# Altium PCB PCB1.PcbDoc
Units mil, origin at the board's own origin, x right, y up, seen from the top; angles counter-clockwise.
Board outline 805.03 x 965.03 mil, 2 copper layers (Top Layer, Bottom Layer); 15 components, 12 nets, 64 pads, 9 vias.
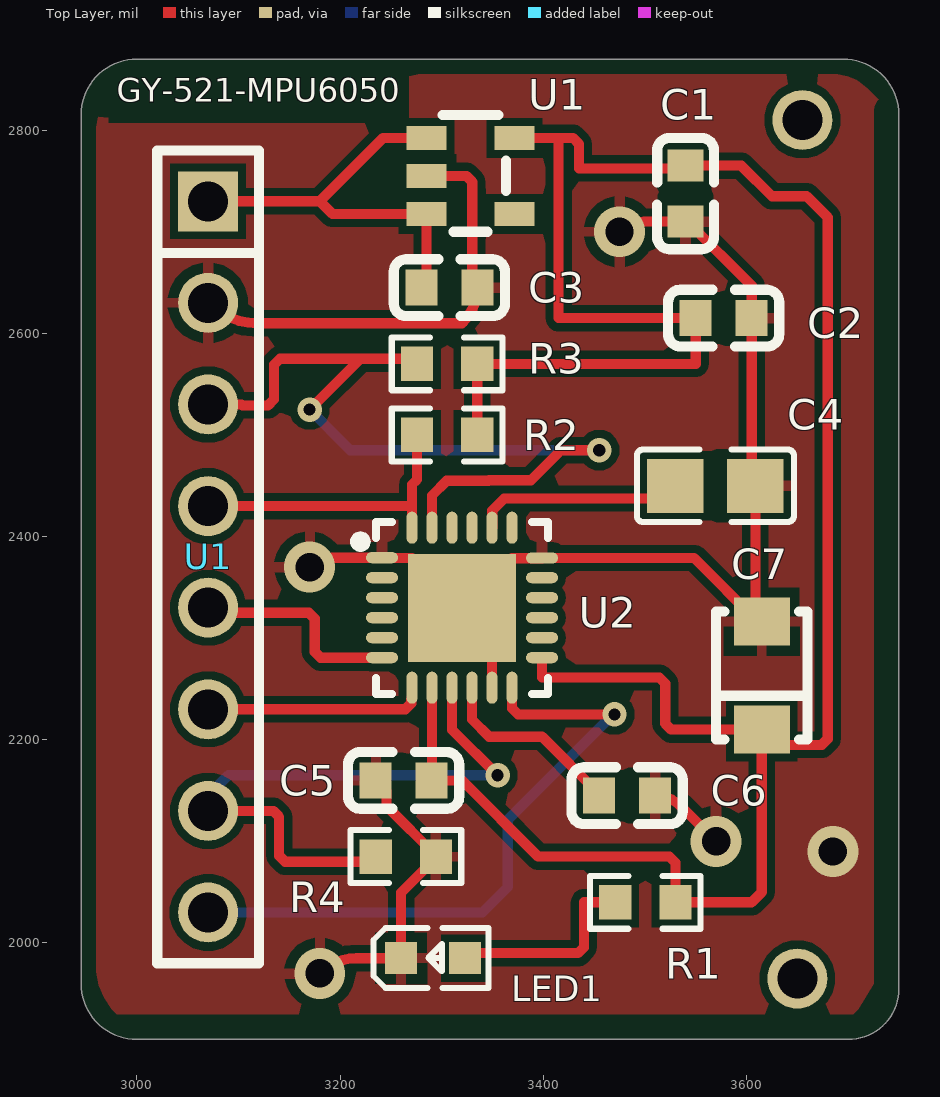
[diagram p0: Top Layer view]
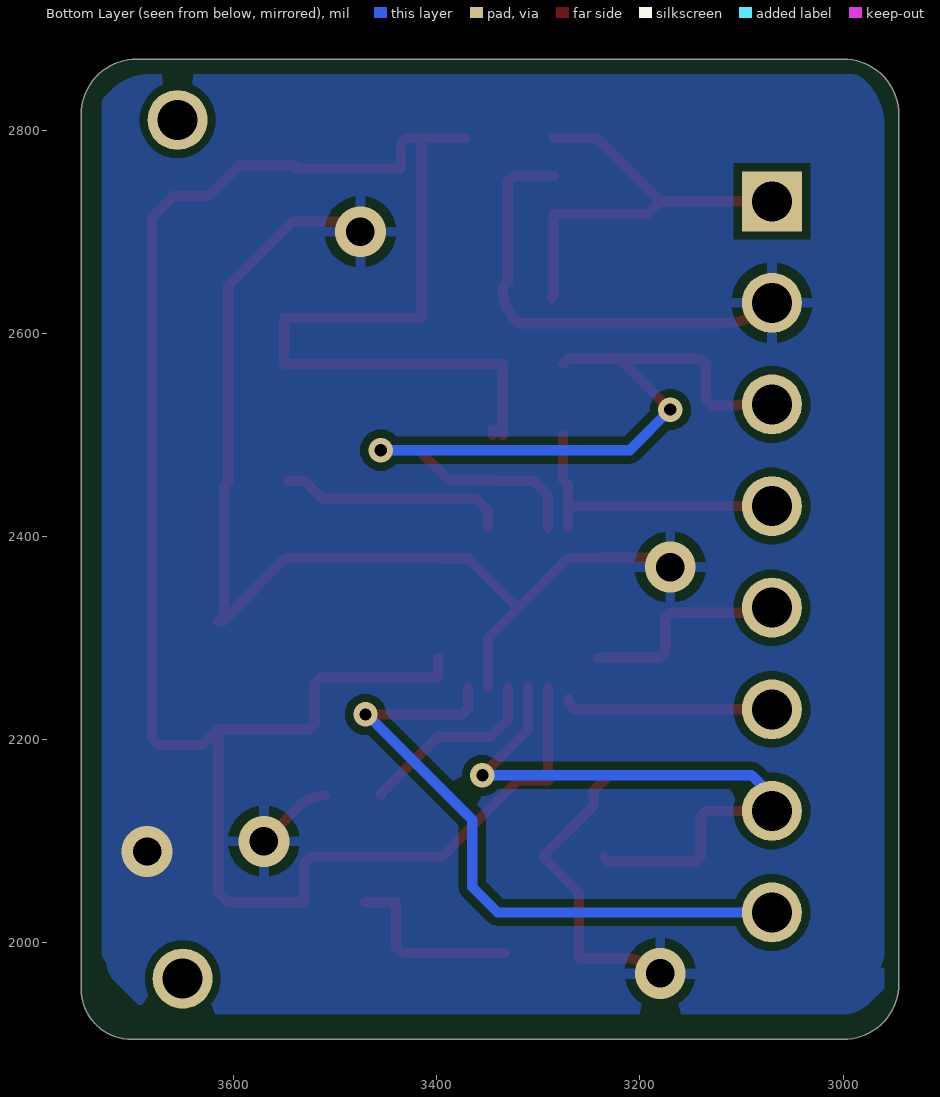
[diagram p1: Bottom Layer view, seen from below]

## Layer stack, top to bottom
Top Solder: solder mask 0.4, Solder Resist, Dk 3.5
Top Layer: signal copper 1.4
Dielectric 1: dielectric 12.6, FR-4, Dk 4.8
Bottom Layer: signal copper 1.4
Bottom Solder: solder mask 0.4, Solder Resist, Dk 3.5

## Board outline
2944.99,1960 2944.99,2815 cw(c3000,2815) 3000,2870.01 3695,2870.01 cw(c3695,2815) 3750.01,2815 3750.01,1955 cw(c3700,1955) 3700,1904.98 3000,1904.98 cw(c3000,1960)

## Design rules (kind name [scope] priority, off if disabled: settings)
Clearance [All] p1: gap=8 ignorepadtopadclearanceinfootprint=FALSE
MinimumSolderMaskSliver [All] p1: minsoldermaskwidth=4
PolygonConnect [All] p1: connectstyle=Relief reliefconductorwidth=10 reliefentries=4 polygonreliefangle="90 Angle" airgapwidth=10
RoutingVias [All] p1: holewidth=28 width=50 viastyle="Through Hole" minholewidth=28 minwidth=50 maxholewidth=28 maxwidth=50
SilkToSilkClearance [All] p1: silktosilkclearance=4.5
SilkToSolderMaskClearance [IsPad] p1: minsilkscreentomaskgap=3.5 clearancetoexposedcopper=TRUE
SolderMaskExpansion [All] p1: expansion=4 istentingtop=FALSE
SupplyNets "Schematic Supply Nets_2" [InNet('+3V3')] p1: voltage=0.000
SupplyNets "Schematic Supply Nets_1" [InNet('GND')] p2: voltage=0.000
SupplyNets "Schematic Supply Nets" [InNet('+MAX6V')] p3: voltage=0.000
Width [All] p1: maxlimit=10 minlimit=10 preferedwidth=10
27 further rules are at their usual default settings.

## Classes and differential pairs
component class Sheet1: C2 C3 C4 C5 C6 C7 LED1 R1 R2 R3 R4 U1 U2

## Components (designator, comment, footprint, x,y, rotation, side; value= is the part's Value field where it differs from the comment)
C1 "100nF" C0603 3540,2737.56 r90 top
C2 "100nF" C0603 3577.56,2615 r180 top
C3 "4.7uF" C0603 3307.56,2645 r180 top
C4 "" C0805 3569.37,2450 r0 top value=2.2nF/50V
C5 "10nF" C0603 3262.56,2160 r180 top value=100nF
C6 "100nF" C0603 3482.44,2145 r180 top
C7 "0.1uF" CAP-SMD_L3.2-W1.6 3615,2263.15 r90 top
LED1 "19-217/R6C-AL1M2VY/3T" LED0603-RD 3291.47,1985 r0 top
R1 "2kΩ" R0603 3500.34,2040 r180 top
R2 "4.7kΩ" R0603 3305.34,2500 r0 top
R3 "4.7kΩ" R0603 3305.34,2570 r0 top
R4 "4.7kΩ" R0603 3264.66,2085 r0 top
U1 "HX9193-33GB-N" SOT-23-5_L2.9-W1.6-P0.95-LS2.8-BL 3328.31,2755 r270 top
U1 "Z-211-0811-0021-001" HDR-TH_8P-P2.54-V-M 3070,2380 r270 top
U2 "MPU-6050" QFN-24_L4.0-W4.0-P0.50-BL-EP2.7 3320,2330 r270 top

## Footprints (in the part's own frame and the unit in brackets; to place one, negate y for a bottom-side part, rotate by r counter-clockwise, add the part's x,y. Pads: shape width x height; smd on the part's side, far side on the other; paste and mask are expansions set on the pad)
C0603 [mm]
  rect 0.8x0.9 smd: 1(-0.7,0) 2(0.7,0)
  silkscreen extent -1.39,-0.71 1.39,0.71
C0805 [mm]
  rect 1.41x1.35 smd paste-100 mask+0.051: 1(-1,0) 2(1,0)
  silkscreen extent -1.96,-0.9 1.96,0.9
CAP-SMD_L3.2-W1.6 [mm]
  rect 1.2x1.4 smd paste+0 mask+0.051: 1(-1.35,0) 2(1.35,0)
  silkscreen extent -1.6,-1.14 1.6,1.14
HDR-TH_8P-P2.54-V-M [mm]
  rect 1.5x1.5 hole 1 paste-2539.97 mask+0.051: 1(-8.89,0)
  round 1.5 hole 1 paste-2539.97 mask+0.051: 2(-6.35,0) 3(-3.81,0) 4(-1.27,0) 5(1.27,0) 6(3.81,0) 7(6.35,0) 8(8.89,0)
  silkscreen extent -10.16,-1.27 10.16,1.27
LED0603-RD [mm]
  rect 0.8x0.8 smd paste+0 mask+0.051: 1(-0.799,0) 2(0.799,0)
  silkscreen extent -1.49,-0.75 1.39,0.76
QFN-24_L4.0-W4.0-P0.50-BL-EP2.7 [mm]
  oval 0.28x0.8 smd paste-100 mask+0.05: 1(-1.25,-2) 2(-0.75,-2) 4(0.25,-2) 5(0.75,-2) 6(1.25,-2) 13(1.25,2) 14(0.75,2) 15(0.25,2) 16(-0.25,2) 17(-0.75,2) 18(-1.242,2)
  oval 0.28x0.8 smd paste+0 mask+0.05: 3(-0.25,-2)
  oval 0.8x0.28 smd paste-100 mask+0.05: 7(2,-1.25) 8(2,-0.75) 9(2,-0.25) 10(2,0.25) 11(2,0.75) 12(2,1.25) 19(-2,1.25) 20(-2,0.75) 22(-2,-0.25) 23(-2,-0.75) 24(-2,-1.25)
  oval 0.8x0.28 smd paste+0 mask+0.05: 21(-2,0.25)
  rect 2.7x2.7 smd paste-100 mask+0.05: 25(0.012,0)
  silkscreen extent -2.14,-2.79 2.16,2.15
R0603 [mil]
  rect 31.75x34.02 smd paste-3937.01 mask+2: 1(-29.66,0) 2(29.66,0)
  silkscreen extent -55,-26 55,26
SOT-23-5_L2.9-W1.6-P0.95-LS2.8-BL [mm]
  rect 0.6x1 smd paste+0 mask+0.05: 1(-0.95,-1.1) 2(0,-1.1) 3(0.95,-1.1) 4(0.95,1.1) 5(-0.95,1.1)
  silkscreen extent -1.52,-0.7 1.4,0.89

## Part data
C1 C2 C5 C6: library part CC0603KRX7R9BB104, JLCPCB Part Class="Basic Part", LCSC Part Name="100nF ±10% 50V", Manufacturer=YAGEO(国巨), Tolerance=±10%, Add into BOM=yes, Convert to PCB=yes, Datasheet=https://atta.szlcsc.com/upload/public/pdf/source/20180910/C282072_33301C7F631E79921B82A8DAC6BCC5B3.pdf, Device=CC0603KRX7R9BB104, Manufacturer Part=CC0603KRX7R9BB104, Supplier=LCSC, Supplier Footprint=0603, Supplier Part=C14663, Symbol=CC0603KRX7R9BB104
C3: library part CL10A475KO8NNNC, JLCPCB Part Class="Basic Part", LCSC Part Name="4.7uF ±10% 16V", Manufacturer=SAMSUNG(三星), Tolerance=±10%, Add into BOM=yes, Convert to PCB=yes, Datasheet=https://atta.szlcsc.com/upload/public/pdf/source/20160218/1457707763339.pdf, Device=CL10A475KO8NNNC, Manufacturer Part=CL10A475KO8NNNC, Supplier=LCSC, Supplier Footprint=0603, Supplier Part=C19666, Symbol=CL10A475KO8NNNC
C4: library part CL21C222JBFNNNE, JLCPCB Part Class="Basic Part", LCSC Part Name="2.2nF ±5% 50V", Manufacturer=SAMSUNG(三星), Tolerance=±5%, Add into BOM=yes, Convert to PCB=yes, Datasheet=https://atta.szlcsc.com/upload/public/pdf/source/20160218/1457707763339.pdf, Device=CL21C222JBFNNNE, Manufacturer Part=CL21C222JBFNNNE, Supplier=LCSC, Supplier Footprint=0805, Supplier Part=C28260, Symbol=CL21C222JBFNNNE
C7: library part 10uF, JLCPCB Part Class="Extended Part", Manufacturer="Kyocera AVX", Manufacturer Part=TPSA106K016R1000, Contributor=LCSC, nameAlias=Value, spicePre=C, spiceSymbolName=TPSA106K016R1000_C282116, Supplier=LCSC, Supplier Part=C282116
LED1: JLCPCB Part Class="Extended Part", Manufacturer=EVERLIGHT(亿光), Manufacturer Part=19-217/R6C-AL1M2VY/3T, spicePre=L, spiceSymbolName=19-217/R6C-AL1M2VY/3T, Supplier=LCSC, Supplier Part=C72044
R1: library part RC0603FR-072KL, JLCPCB Part Class="Extended Part", LCSC Part Name="厚膜电阻 2kΩ ±1% 100mW", Manufacturer=YAGEO(国巨), Operating Temperature=-55℃~+155℃, Power(Watts)=100mW, Temperature Coefficient=±100ppm/℃, Tolerance=±1%, Voltage-Supply(Max)=75V, Add into BOM=yes, Convert to PCB=yes, Datasheet=https://atta.szlcsc.com/upload/public/pdf/source/20180316/70C0E2BDAE7FCC62C531A5A58D202EE1.pdf, Device=RC0603FR-072KL, Manufacturer Part=RC0603FR-072KL, Supplier=LCSC, Supplier Footprint=0603, Supplier Part=C105576, Symbol=RC0603FR-072KL, Type="Thick Film Resistors"
R2 R3 R4: library part RC0603FR-074K7L, JLCPCB Part Class="Extended Part", LCSC Part Name="厚膜电阻 4.7kΩ ±1% 100mW", Manufacturer=YAGEO(国巨), Operating Temperature Range=-55℃~+155℃, Temperature Coefficient=±100ppm/℃, Tolerance=±1%, Add into BOM=yes, Convert to PCB=yes, Datasheet=https://atta.szlcsc.com/upload/public/pdf/source/20180224/C181757_15194369480721363983.pdf, Device=RC0603FR-074K7L, Manufacturer Part=RC0603FR-074K7L, Supplier=LCSC, Supplier Footprint=0603, Supplier Part=C99782, Symbol=RC0603FR-074K7L, Type="Thick Film Resistors"
U1: JLCPCB Part Class="Extended Part", Manufacturer=HX(恒佳兴), Contributor=lcsc, Manufacturer Part=HX9193-33GB-N, spicePre=U, spiceSymbolName=HX9193-33GB-N, Supplier=LCSC, Supplier Part=C2995655
U1: JLCPCB Part Class="Extended Part", Manufacturer=Nextron(正凌), Contributor=LCSC, Manufacturer Part=Z-211-0811-0021-001, spicePre=U, spiceSymbolName=Z-211-0811-0021-001, Supplier=LCSC, Supplier Part=C190820
U2: JLCPCB Part Class="Extended Part", Manufacturer="TDK InvenSense(应美盛)", Operating Temperature=-40℃~+85℃, Add into BOM=yes, Convert to PCB=yes, Datasheet=https://atta.szlcsc.com/upload/public/pdf/source/20140425/1457707046159.pdf, Device=MPU-6050, LCSC Part Name=MPU-6050, Manufacturer Part=MPU-6050, Sensor Type=加速度计陀螺仪, Supplier=LCSC, Supplier Footprint=QFN-24-EP(4x4), Supplier Part=C24112, Symbol=MPU-6050_C24112

## Free pads (board coordinates)
  round 59.05 hole 39.37 paste-99999 mask+2: 3(3655,2810) 4(3650,1965)

## Via types
v1: diameter 50, hole 28, Top Layer to Bottom Layer, 5 vias
v2: diameter 24, hole 12, Top Layer to Bottom Layer, 4 vias

## Nets (pads, with @x,y where several pads share a name; then routed paths per layer and width w, separated by ;. In a path a pad name is that pad's centre, name@x,y a point inside that pad or via, vN(x,y) a via of type N, cw(c..) or ccw(c..) an arc to the next point about the centre after c; other vN are vias at no path point)
+3V3: C1.2 C2.2 C5.1 C7.1 R1.1 R2.2 R3.2 U1.5@3371.62,2792.4 U2.8 U2.13 | length 2581.8
  Top Layer w10: U2.8 3290.47,2160.35 C5.1 3320,2160 3395,2085 3524.14,2085 3530,2079.14 R1.1 3605,2040 3615,2050 C7.1 ; R2.2@3340,2505 R2.2 R3.2 3550,2570 C2.2 ; R2.2@3345,2500 R2.2@3345,2505 ; U1.5@3371.62,2792.4 3415,2792.4 ; U2.13 3398.74,2261.28 3514.14,2261.28 3520,2255.42 3520,2215.86 3525.86,2210 C7.1 ; 3500,2615 C2.2 ; 3415,2792.4 3415,2615 C2.2 ; 3415,2792.4 3429.14,2792.4 3435,2786.54 3435,2762.4 3537.28,2762.4 C1.2 3594.88,2765.12 3625,2735 3659.14,2735 3680,2714.14 3680,2200.86 3674.14,2195 3630,2195 C7.1
+MAX6V: C3.2 U1.1 U1.3@3285,2717.6 | length 449.3
  Top Layer w10: U1.1@3055,2730 3180,2730 ; U1.1@3285,2792.4 3242.4,2792.4 3180,2730 ; C3.2@3286.69,2635 3285,2636.69 3285,2717.6 3192.4,2717.6 3180,2730
AD0: R4.1 U1.7 U2.9 | length 644.5
  Top Layer w10: U1.7@3055,2130 3134.14,2130 3140,2124.14 3140,2085.86 3145.86,2080 3230,2080 R4.1 ; U2.9 3310.16,2209.84 v2(3355,2165)
  Bottom Layer w10: U1.7@3055,2130 3090,2165 v2(3355,2165)
GND: C1.1 C2.1 C3.1 C4.2 C5.2 C6.1 C7.2 LED1.1 R4.2 U1.2 U2.1 U2.11 U2.18 U2.25 | length 1919.6
  Top Layer w10: U1.2@3070,2630 ccw(c3118.28,2678.28) 3118.28,2610 3320,2610 3321.06,2611.06 ccw(c3287.13,2645) C3.1 3330,2650.12 3330,2749.14 3324.14,2755 U1.2@3285,2755 ; v1(3170,2370) cw(c3192.23,2347.77) 3192.23,2379.21 U2.1 3241.46,2379.01 3270.5,2379.01 U2.25 ; v1(3180,1970) cw(c3216.21,1933.79) 3216.21,1985 LED1.1 3260,2049.55 3294.32,2083.87 R4.2 3294.32,2086.13 3245.75,2134.7 3245.75,2149.25 C5.2 ; U2.11 3349.53,2299.98 U2.25 ; v1(3475,2700) cw(c3499.14,2675.86) 3499.14,2710 C1.1 ; C6.1 cw(c3510,2108.79) 3535.61,2134.39 v1(3570,2100) ; C1.1@3541.97,2710 3605.12,2646.85 C2.1 3605.12,2453.62 C4.2 3608.74,2322.57 C7.2 3611.06,2316.31 3548.47,2378.9 U2.18 3398.54,2378.7 3369.19,2378.7 U2.25
  other v1: 3685,2090
INT: U1.8 U2.12 | length 658.2
  Top Layer w10: U2.12 3369.21,2230.86 3375.07,2225 v2(3470,2225)
  Bottom Layer w10: U1.8@3055,2030 3340,2030 3365,2055 3365,2121.26 3468.74,2225 v2(3470,2225)
NetC4_1: C4.1 U2.20 | length 225.7
  Top Layer w10: U2.20 3349.73,2408.94 3349.73,2425.67 3361.54,2437.49 3512.49,2437.49 3530,2455 C4.1@3546.26,2455
NetC6_2: C6.2 U2.10 | length 188.5
  Top Layer w10: U2.10 3329.84,2220 3346.84,2203 3398.85,2203 3454.88,2146.97 C6.2
NetLED1_2: LED1.2 R1.2 | length 184.3
  Top Layer w10: LED1.2@3332.95,1990.01 3434.14,1990.01 3440,1995.86 3440,2040 R1.2
SCL: R3.1 U1.3@3070,2530 U2.23 | length 854.1
  Top Layer w10: U1.3@3055,2530 3102.97,2530 3103.83,2529.14 3129.14,2529.14 3135,2535 3135,2569.14 3140.86,2575 3225,2575 ; v2(3170,2525) 3220,2575 3225,2575 ; R3.1 3270.68,2575 3225,2575 ; U2.23 3290.47,2440.47 3305,2455 3346.2,2455 3346.69,2455.49 3387.89,2455.49 3417.4,2485 v2(3455,2485)
  Bottom Layer w10: v2(3170,2525) 3210,2485 v2(3455,2485)
SDA: R2.1 U1.4@3070,2430 U2.24 | length 309.1
  Top Layer w10: U1.4@3055,2430 3270.75,2430 3270.79,2429.96 ; U2.24 3270.79,2429.96 ; R2.1 3275.68,2456.07 3270.79,2451.18 3270.79,2429.96
XCL: U1.6 U2.7 | length 221.5
  Top Layer w10: U1.6@3055,2230 3264.1,2230 3269.96,2235.86 U2.7@3269.96,2240
XDA: U1.5@3070,2330 U2.6 | length 225.7
  Top Layer w10: U1.5@3055,2330 3060,2325 3169.14,2325 3175,2319.14 3175,2286.65 3180.86,2280.79 U2.6
pads on no net: U1.4@3371.62,2717.6 U2.2 U2.3 U2.4 U2.5 U2.14 U2.15 U2.16 U2.17 U2.19 U2.21 U2.22

## Polygon pours and split planes (outlines as drawn)
GND on Bottom Layer "NONET_L-01_P-001" (solid, pour order 2): 2964.57,1975 cw(c2976.64,1987.07) 2959.57,1987.07 2959.57,2805 cw(c3019.93,2805) 2977.25,2847.68 2979.57,2850 cw(c2991.64,2837.93) 2991.64,2855 3683.36,2855 cw(c3683.36,2803.79) 3719.57,2840 3726.04,2833.54 cw(c3717.5,2825) 3729.57,2825 3729.57,1992.07 cw(c3712.5,1992.07) 3724.57,1980 cw(c3700.43,1980) 3717.5,1962.93 3694.57,1940 cw(c3670.43,1964.14) 3670.43,1930 2999.57,1930 cw(c2999.57,1966.21) 2973.96,1940.61 2959.57,1955 2959.57,1980
GND on Top Layer "NONET_L-01_P-001" (solid, pour order 3): 3710,1935 3705,1930 2980,1930 cw(c3028.28,1978.28) 2960,1978.28 2960,2794.64 cw(c3045.36,2794.64) 2985,2855 3685,2855 cw(c3685,2806.72) 3719.14,2840.86 3730,2830 ccw(c3742.07,2817.93) 3725,2817.93 3725,1960

## Other copper
Top Layer:

## Silkscreen, mask and mechanical layers (free items; w line width, h text height)
Top Overlay:
  text "GY-521-MPU6050" at 2980,2820 h40
Mechanical 1:
  lines w10: 3645,1910 3700,1910 ccw(c3700,1955) 3745,1955 ; 3660,1910 3000,1910 cw(c3000,1960) 2950,1960 2950,2815 ; 3745,2790 3745,2815 ; 3745,2810 3745,1955 ; 2950,2815 cw(c3000,2815) 3000,2865 ; 2950,2815 cw(c3000,2815) 3000,2865 ; 3000,2865 3045,2865 3695,2865 cw(c3695,2815) 3745,2815 ; 3745,1955 3745,2815